# EAGLE board practice (EAGLE 9.6.2)

Size 160 x 100 mm. Coordinates in mm from the lower left corner, seen from the top.
Outline: 0,0 160,0 160,100 0,100 0,0
Copper layers (1*16): Top 0.035mm / dielectric 1.5mm / Bottom 0.035mm
Design rules "default": minimum track width 6mil, minimum drill 0.35mm, track to track 6mil, track to pad 6mil, pad to pad 6mil, via to via 6mil, smd to smd 6mil, copper to edge 40mil, drill to drill 6mil, minimum pad ring 10mil, minimum via ring 8mil, stop-mask expansion 4mil, vias tented up to drill 0mil, thermal gap 10mil

## Footprints (pad centres in the part's own frame; a part is rotated, then mirrored left to right if it is on the bottom)
C025-040X050 = drill 0.813 octagon: 1 -1.27,0; 2 1.27,0
DIL08 = drill 0.813 pad 1.27: 1 -3.81,-3.81; 2 -1.27,-3.81; 3 1.27,-3.81; 4 3.81,-3.81; 5 3.81,3.81; 6 1.27,3.81; 7 -1.27,3.81; 8 -3.81,3.81
0207/10 = drill 0.813 octagon: 1 -5.08,0; 2 5.08,0
ESP32-DEVKITV1 = drill 1 pad 1.93: 1 -22.87,-13.54; 2 -20.33,-13.54; 3 -17.79,-13.54; 4 -15.25,-13.54; 5 -12.71,-13.54; 6 -10.17,-13.54; 7 -7.63,-13.54; 8 -5.09,-13.54; 9 -2.55,-13.54; 10 -0.01,-13.54; 11 2.53,-13.54; 12 5.07,-13.54; 13 7.61,-13.54; 14 10.15,-13.54; 15 12.69,-13.54; 16 12.69,11.23; 17 10.15,11.23; 18 7.61,11.23; 19 5.07,11.23; 20 2.53,11.23; 21 -0.01,11.23; 22 -2.55,11.23; 23 -5.09,11.23; 24 -7.63,11.23; 25 -10.17,11.23; 26 -12.71,11.23; 27 -15.25,11.23; 28 -17.79,11.23; 29 -20.33,11.23; 30 -22.87,11.23

## Placement (x,y rotation side)
C1  [C025-040X050]  -29.21,12.7 0 top  (outside the outline)
IC2  LM741P  [DIL08]  -19.05,5.08 0 top  (outside the outline)
IC3  LM741P  [DIL08]  -19.05,15.24 0 top  (outside the outline)
R2  [0207/10]  -19.05,21.59 0 top  (outside the outline)
R3  [0207/10]  -19.05,26.67 0 top  (outside the outline)
U$1  ESP32DEVKITV1  [ESP32-DEVKITV1]  1.27,-16.51 0 top  (outside the outline)

## Library data of the parts
C1 = rcl; SPICEPREFIX: C
IC2 IC3 = linear
R2 R3 = rcl; SPICEPREFIX: R
U$1 = ESP32-DEVKITV1

## Nets
N$1: IC2.5 IC3.5
N$2: IC2.1 IC3.1
N$3: IC2.2 IC2.6 IC3.2 IC3.6
N$6: IC2.8 IC3.8
N$7: IC2.7 IC3.7
N$8: IC2.4 IC3.4
N$9: C1.1 IC2.3 IC3.3 R2.1 R3.2
N$10: R3.1
N$11: C1.2

## Tracks (layer width: path | path; a pad name or v marks a point on that pad's centre or on a via)
N$1  (1 unrouted)
N$2  (1 unrouted)
N$3  (3 unrouted)
N$6  (1 unrouted)
N$7  (1 unrouted)
N$8  (1 unrouted)
N$9  (4 unrouted)